# EAGLE board mainboard (EAGLE 6.5.0)
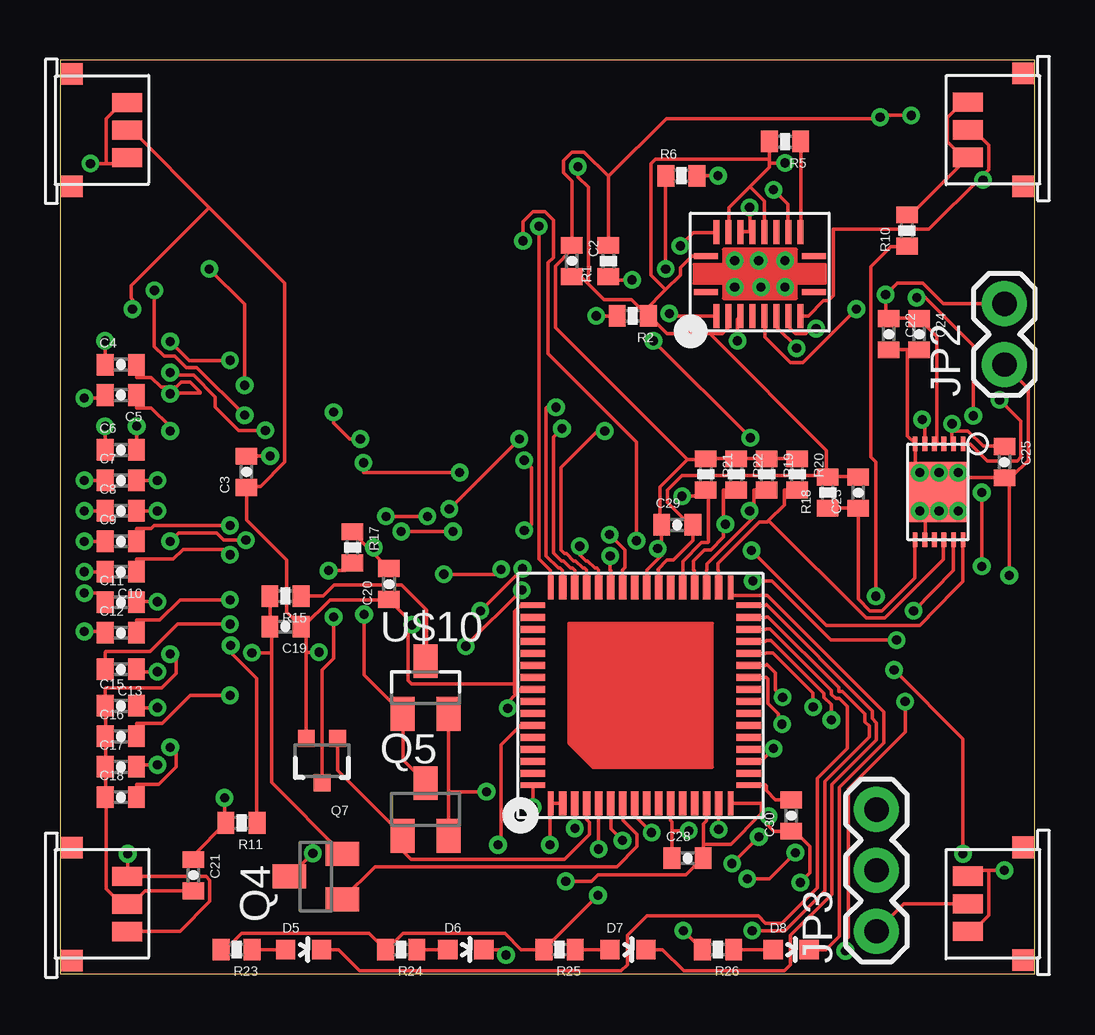
[diagram p0: board, top side]
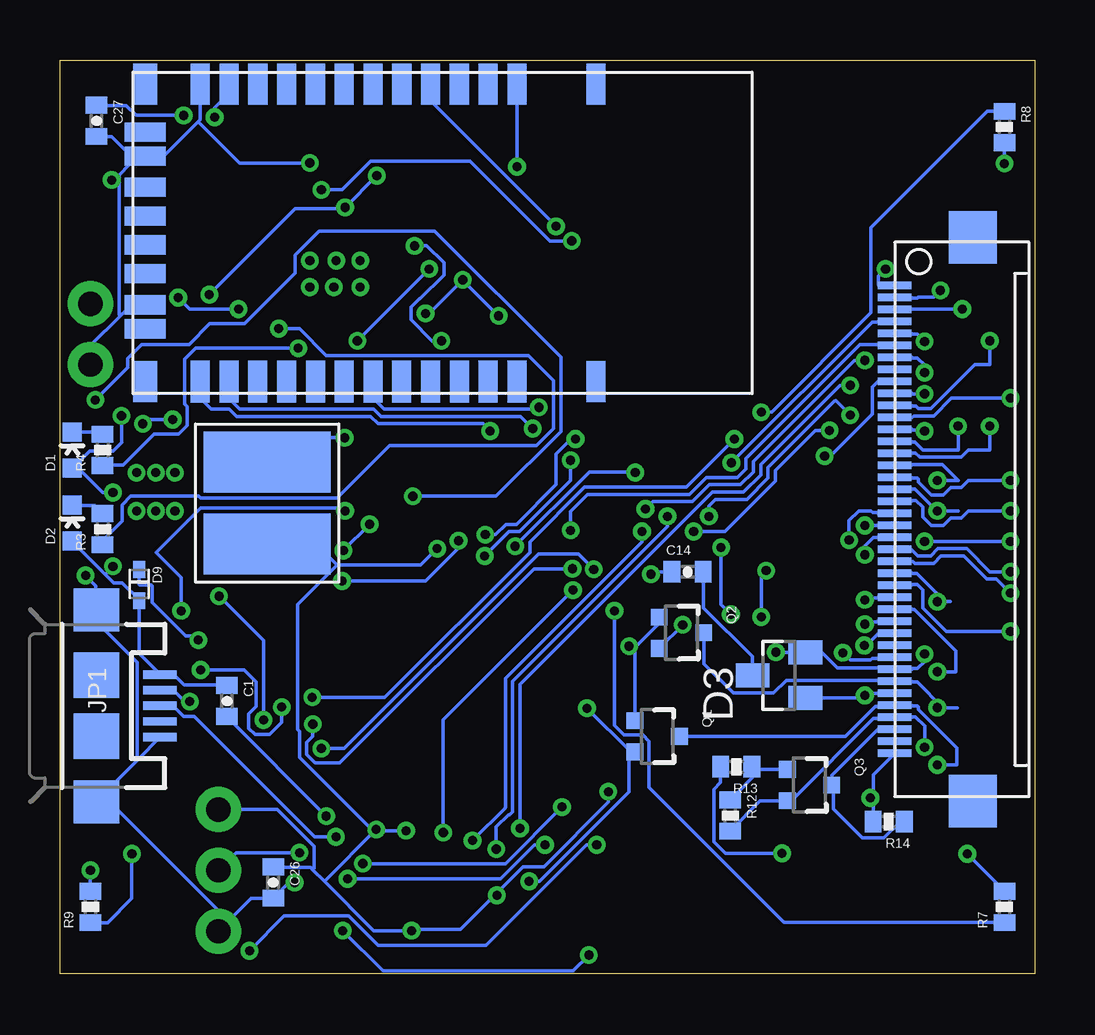
[diagram p1: board, bottom side, seen from below]

Size 40.64 x 38.1 mm. Coordinates in mm from the lower left corner, seen from the top.
Outline: 0,0 40.64,0 40.64,38.1 0,38.1 0,0
Copper layers (1*16): Top 0.035mm / dielectric 1.5mm / Bottom 0.035mm
Design rules "default *": minimum track width 6mil, minimum drill 15mil, track to track 6mil, track to pad 6mil, pad to pad 6mil, via to via 6mil, smd to smd 6mil, copper to edge 2mil, drill to drill 8mil, minimum pad ring 7mil, minimum via ring 7mil, stop-mask expansion 4mil, vias tented up to drill 0mil, thermal gap 10mil

## Footprints (pad centres in the part's own frame; a part is rotated, then mirrored left to right if it is on the bottom)
0402-CAP = smd 0.7 x 0.9: 1 -0.65,0; 2 0.65,0
LED-0603 = smd 0.8 x 0.8: A 0,-0.75; C 0,0.75
SOT23 = smd 1 x 1.4: 1 -0.95,-1.1; 2 0.95,-1.1; 3 0,1.1
SOD523 = smd 0.7 x 0.5: A 0.7,0; C -0.6,0
USB-MICROB = smd 0.35 x 1.4: D+ 0,2.65; D- -0.65,2.65; GND 1.3,2.65; ID 0.65,2.65; VBUS -1.3,2.65 | smd 1.8 x 1.9: MT1 -4,0; MT2 4,0 | smd 1.9 x 1.9: P$1 -1.27,0; P$2 1.27,0
1X02 = drill 1.016 pad 1.88: 1 0,0; 2 2.54,0
1X03 = drill 1.016 pad 1.88: 1 0,0; 2 2.54,0; 3 5.08,0
ASPI_0428S-100M-T = smd 5.309 x 2.54: 1 0,0; 2 0,3.404
SOT323 = smd 0.7 x 0.7: 1 -0.65,-0.925; 2 0.65,-0.925; 3 0,0.925
0402-RES = smd 0.7 x 0.9: 1 -0.65,0; 2 0.65,0
VQFN_RGC_64PIN = smd 1.016 x 0.229: 1 0,8.25; 16 0,0.75; 33 9,0.75; 48 9,8.25 | smd 1.016 x 0.305: 2 0,7.75; 3 0,7.25; 4 0,6.75; 5 0,6.25; 6 0,5.75; 7 0,5.25; 8 0,4.75; 9 0,4.25; 10 0,3.75; 11 0,3.25; 12 0,2.75; 13 0,2.25; 14 0,1.75; 15 0,1.25; 34 9,1.25; 35 9,1.75; 36 9,2.25; 37 9,2.75; 38 9,3.25; 39 9,3.75; 40 9,4.25; 41 9,4.75; 42 9,5.25; 43 9,5.75; 44 9,6.25; 45 9,6.75; 46 9,7.25; 47 9,7.75 | smd 0.229 x 1.016: 17 0.75,0; 32 8.25,0; 49 8.25,9; 64 0.75,9 | smd 0.305 x 1.016: 18 1.25,0; 19 1.75,0; 20 2.25,0; 21 2.75,0; 22 3.25,0; 23 3.75,0; 24 4.25,0; 25 4.75,0; 26 5.25,0; 27 5.75,0; 28 6.25,0; 29 6.75,0; 30 7.25,0; 31 7.75,0; 50 7.75,9; 51 7.25,9; 52 6.75,9; 53 6.25,9; 54 5.75,9; 55 5.25,9; 56 4.75,9; 57 4.25,9; 58 3.75,9; 59 3.25,9; 60 2.75,9; 61 2.25,9; 62 1.75,9; 63 1.25,9
RN-42 = smd 1.7 x 0.8: 1 0.5,16; 2 0.5,14.8; 3 0.5,13.6; 4 0.5,12.4; 5 0.5,11.2; 6 0.5,10; 7 0.5,8.8; 8 0.5,7.6; 9 0.5,6.4; 10 0.5,5.2; 11 0.5,4; 12 0.5,2.8; 13 12.9,2.8; 14 12.9,4; 15 12.9,5.2; 16 12.9,6.4; 17 12.9,7.6; 18 12.9,8.8; 19 12.9,10; 20 12.9,11.2; 21 12.9,12.4; 22 12.9,13.6; 23 12.9,14.8; 24 12.9,16; P$35 0.5,19.3; P$36 12.9,19.3 | smd 0.8 x 1.7: 28 9.7,0.5; 29 3.5,0.5; 30 10.7,0.5; 31 8.4,0.5; 32 7.2,0.5; 33 6,0.5; 34 4.8,0.5; 35 2.5,0.5 | smd 1.7 x 1: P$33 0.5,0.5; P$34 12.9,0.5
VQFN_RHL_20PIN = smd 1 x 0.25: 1 0,1; 10 4.5,1; 11 4.5,2.5; 20 0,2.5 | smd 0.25 x 1: 2 0.45,0; 3 0.95,0; 4 1.45,0; 5 1.95,0; 6 2.45,0; 7 2.95,0; 8 3.45,0; 9 3.95,0; 12 3.95,3.5; 13 3.45,3.5; 14 2.95,3.5; 15 2.45,3.5; 16 1.95,3.5; 17 1.45,3.5; 18 0.95,3.5; 19 0.45,3.5 | drill 0.381: P$21 1.2,2.3; P$22 1.2,1.2; P$23 2.3,1.2; P$24 2.2,2.3; P$25 3.3,2.3; P$26 3.3,1.2
EVP-AEDB2A = smd 0.8 x 1.25: 1 0,0; 1' 2.3,0; 2 1.15,0 | smd 0.9 x 0.9: P$4 -1.2,-2.3; P$5 3.5,-2.3
FH12-40S-0.5SH = smd 0.31 x 1.4: 1 0,0; 2 0.5,0; 3 1,0; 4 1.5,0; 5 2,0; 6 2.5,0; 7 3,0; 8 3.5,0; 9 4,0; 10 4.5,0; 11 5,0; 12 5.5,0; 13 6,0; 14 6.5,0; 15 7,0; 16 7.5,0; 17 8,0; 18 8.5,0; 19 9,0; 20 9.5,0; 21 10,0; 22 10.5,0; 23 11,0; 24 11.5,0; 25 12,0; 26 12.5,0; 27 13,0; 28 13.5,0; 29 14,0; 30 14.5,0; 31 15,0; 32 15.5,0; 33 16,0; 34 16.5,0; 35 17,0; 36 17.5,0; 37 18,0; 38 18.5,0; 39 19,0; 40 19.5,0 | smd 2.2 x 2: G@0 -2,3.25; G@1 21.5,3.25
SON_DRZ_12PIN = smd 0.2 x 0.6: 1 0.2,0; 2 0.6,0; 3 1,0; 4 1.4,0; 5 1.8,0; 6 2.2,0; 7 2.2,4; 8 1.8,4; 9 1.4,4; 10 1,4; 11 0.6,4; 12 0.2,4 | smd 2.5 x 2.5: 13 1.25,2 | drill 0.381: P$15 0.4,2.8; P$16 1.2,2.8; P$17 2,2.8; P$18 2,1.2; P$19 1.2,1.2; P$20 0.4,1.2

## Placement (x,y rotation side)
C1  0.1uF  [0402-CAP]  33.68,11.38 270 bottom
C2  10uF  [0402-CAP]  21.34,29.72 270 top
C3  [0402-CAP]  7.77,20.93 90 top
C4  [0402-CAP]  2.54,25.4 0 top
C5  [0402-CAP]  2.54,24.13 180 top
C6  [0402-CAP]  2.54,21.84 0 top
C7  [0402-CAP]  2.54,20.57 0 top
C8  [0402-CAP]  2.54,19.3 0 top
C9  [0402-CAP]  2.54,18.03 0 top
C10  [0402-CAP]  2.54,16.76 180 top
C11  [0402-CAP]  2.54,15.49 0 top
C12  [0402-CAP]  2.54,14.22 0 top
C13  [0402-CAP]  2.54,12.7 180 top
C14  [0402-CAP]  14.48,16.76 0 bottom
C15  [0402-CAP]  2.54,11.18 0 top
C16  [0402-CAP]  2.54,9.91 0 top
C17  [0402-CAP]  2.54,8.64 0 top
C18  [0402-CAP]  2.54,7.37 0 top
C19  [0402-CAP]  9.4,14.48 180 top
C20  [0402-CAP]  13.72,16.26 90 top
C21  [0402-CAP]  5.56,4.11 270 top
C22  0.1uF  [0402-CAP]  34.54,26.67 270 top
C23  0.1uF  [0402-CAP]  33.27,20.07 90 top
C24  0.1uF  [0402-CAP]  35.81,26.67 270 top
C25  0.47uF  [0402-CAP]  39.37,21.34 270 top
C26  [0402-CAP]  31.75,3.81 270 bottom
C27  0.1uF  [0402-CAP]  39.12,35.56 270 bottom
C28  0.1uF  [0402-CAP]  26.16,4.83 0 top
C29  0.1uF  [0402-CAP]  25.73,18.72 0 top
C30  0.47uF  [0402-CAP]  30.48,6.6 90 top
D1  BLUE  [LED-0603]  40.13,21.84 0 bottom
D2  BLUE  [LED-0603]  40.13,18.8 0 bottom
D3  BAT54S  [SOT23]  10.67,12.45 90 bottom
D5  BLUE  [LED-0603]  10.16,1.02 270 top
D6  BLUE  [LED-0603]  16.92,1.02 270 top
D7  BLUE  [LED-0603]  23.67,1.02 270 top
D8  BLUE  [LED-0603]  30.48,1.02 270 top
D9  [SOD523]  37.34,16.26 270 bottom
JP1  USB-MICROB  [USB-MICROB]  39.12,11.18 270 bottom
JP2  M02PTH  [1X02]  39.37,25.4 90 top
JP3  [1X03]  34.04,1.78 90 top
L1  10uH  [ASPI_0428S-100M-T]  32,21.34 180 bottom
Q1  MOSFET-NCHANNEL2N7002PW  [SOT323]  15.75,9.91 270 bottom
Q2  MOSFET-NCHANNEL2N7002PW  [SOT323]  14.73,14.22 270 bottom
Q3  MOSFET-NCHANNEL2N7002PW  [SOT323]  9.4,7.87 270 bottom
Q4  BSS84  [SOT23]  10.67,4.06 90 top
Q5  BSS84  [SOT23]  15.24,6.86 0 top
Q7  MOSFET-NCHANNEL2N7002PW  [SOT323]  10.92,8.89 180 top
R1  56K  [0402-RES]  22.86,29.72 90 top
R2  10K  [0402-RES]  23.88,27.43 180 top
R3  1.5K  [0402-RES]  38.86,18.54 90 bottom
R4  1.5K  [0402-RES]  38.86,21.84 90 bottom
R5  1.6K  [0402-RES]  30.23,34.7 180 top
R6  10K  [0402-RES]  25.91,33.27 0 top
R7  [0402-RES]  1.27,2.79 90 bottom
R8  [0402-RES]  1.27,35.31 270 bottom
R9  [0402-RES]  39.37,2.79 90 bottom
R10  [0402-RES]  35.31,30.99 90 top
R11  [0402-RES]  7.57,6.3 180 top
R12  [0402-RES]  12.7,6.6 270 bottom
R13  [0402-RES]  12.45,8.64 180 bottom
R14  [0402-RES]  6.1,6.35 180 bottom
R15  [0402-RES]  9.4,15.75 180 top
R17  [0402-RES]  12.19,17.78 270 top
R18  0.01  [0402-RES]  32,20.07 90 top
R19  10K  [0402-RES]  29.46,20.83 270 top
R20  10K  [0402-RES]  30.73,20.83 270 top
R21  1.8M  [0402-RES]  26.92,20.83 270 top
R22  10K  [0402-RES]  28.19,20.83 270 top
R23  [0402-RES]  7.37,1.02 180 top
R24  [0402-RES]  14.22,1.02 180 top
R25  [0402-RES]  20.83,1.02 180 top
R26  [0402-RES]  27.43,1.02 180 top
U$1  MSP430F5528  [VQFN_RGC_64PIN]  28.7,7.11 90 top
U$2  RN-42  [RN-42]  37.59,37.59 270 bottom
U$3  BQ25010  [VQFN_RHL_20PIN]  26.92,27.43 0 top
U$4  EVP-AEDB2A  [EVP-AEDB2A]  2.79,4.06 270 top
U$5  EVP-AEDB2A  [EVP-AEDB2A]  2.79,36.32 270 top
U$6  EVP-AEDB2A  [EVP-AEDB2A]  37.85,1.78 90 top
U$7  EVP-AEDB2A  [EVP-AEDB2A]  37.85,34.04 90 top
U$8  FH12-40S-0.5SH  [FH12-40S-0.5SH]  5.84,28.7 270 bottom
U$9  BQ27410  [SON_DRZ_12PIN]  37.85,22.1 180 top
U$10  DMG2305UX  [SOT23]  15.24,11.94 0 top

## Library data of the parts
C1-C30 = SparkFun-Capacitors
D1 D2 D5-D8 = SparkFun-LED; PROD_ID: DIO-08575
D3 = diode
D9 = SparkFun-DiscreteSemi
JP1 = SparkFun-Connectors; PROD_ID: CONN-09505
JP2 JP3 = SparkFun-Connectors
L1 U$1-U$10 = TuansLib
Q1-Q3 Q7 = SparkFun-DiscreteSemi; PROD_ID: TRANS-11151
Q4 Q5 = transistor-small-signal
R1-R15 R17-R26 = SparkFun-Passives

## Nets
BATT_PWR: C22.1 C24.1 JP2.2 R6.2 U$3.16 U$3.17 U$9.3 U$9.4
BORDER: Q3.3 R14.1 U$8.38
BT_BAUD: U$1.48 U$2.4
BT_CONN: U$1.47 U$2.19
BTN_0: R7.1 U$1.26
BTN_1: R8.1 U$1.27
BTN_2: R9.1 U$1.28
BTN_3: R10.1 U$1.29
EPD_BORDER: Q4.1 U$1.7
EPD_BUSY: U$1.5 U$8.2
EPD_CS: U$1.3 U$8.1
EPD_DISCHARGE: Q1.1 Q2.1 U$1.8
EPD_PANEL: Q5.1 Q7.1 U$1.4
EPD_PWM: C14.1 U$1.19
EPD_RST: U$1.6 U$8.7
GND: C1.2 C2.2 C3.1 C15.1 C16.1 C17.1 C18.1 C19.1 C20.1 C21.2 C22.2 C23.2 C24.2 C25.2 C26.2 C27.2 C28.2 C29.2 C30.1 D3.2 JP1.GND JP1.MT1 JP1.MT2 JP2.1 JP3.1 Q1.2 Q2.2 Q7.2 R2.1 R5.2 R18.2 U$1.14 U$1.16 U$1.39 U$1.49 U$1.56 U$2.1 U$2.12 U$2.28 U$2.29 U$3.3 U$3.9 U$3.15 U$3.18 U$3.20 U$4.2 U$5.2 U$6.2 U$7.2 U$8.3 U$8.33 U$9.6 U$9.8 U$9.9 U$9.13 U$9.P$15 U$9.P$16 U$9.P$17 U$9.P$18 U$9.P$19 U$9.P$20
LED_0: D5.C U$1.30
LED_1: D6.C U$1.31
LED_2: D7.C U$1.32
LED_3: D8.C U$1.33
N$1: R5.1 U$3.12
N$2: D1.C R4.2
N$3: D9.C U$3.13
N$4: D2.C R3.2
N$5: R1.1 R2.2 U$3.2
N$6: L1.1 U$3.19
N$7: C30.2 U$1.17
N$8: Q4.3 R13.2
N$9: C14.2 D3.3
N$10: R4.1 U$3.7
N$11: R3.1 U$3.8
N$12: R6.1 U$3.4
N$13: R7.2 U$4.1 U$4.1'
N$14: R8.2 U$5.1 U$5.1'
N$15: R9.2 U$6.1 U$6.1'
N$16: R10.2 U$7.1 U$7.1'
N$26: C4.2 U$8.10
N$27: C4.1 U$8.11
N$28: C5.2 U$8.12
N$29: C5.1 U$8.13
N$30: C6.2 U$8.14
N$31: C6.1 U$8.15
N$32: C7.2 U$8.16
N$33: C7.1 U$8.17
N$34: C8.2 U$8.18
N$35: C8.1 U$8.19
N$36: C9.1 U$8.20
N$37: C9.2 U$8.21
N$38: C10.1 U$8.22
N$39: C10.2 U$8.23
N$40: C11.1 U$8.24
N$41: C11.2 U$8.25
N$42: C12.1 U$8.26
N$43: C12.2 U$8.27
N$44: C13.1 U$8.28
N$45: C13.2 U$8.29
N$46: C3.2 U$8.9
N$47: R15.1 U$10.3
N$48: D5.A R23.1
N$49: Q3.1 R12.1 R13.1
N$50: C20.2 Q5.3 R17.1 U$10.1
N$51: D6.A R24.1
N$52: Q7.3 R17.2
N$54: C23.1 R18.1 U$9.7
N$55: D7.A R25.1
N$56: D8.A R26.1
PM_BIN: R21.2 U$1.37 U$9.1
PM_GPOUT: R22.2 U$1.36 U$9.12
PM_SCL: R19.2 U$1.35 U$9.11
PM_SDA: R20.2 U$1.34 U$9.10
SENSOR_DATA: JP3.2 U$1.1 U$1.2
SPI_CLK: U$1.44 U$8.4
SPI_MISO: U$1.43 U$8.6
SPI_MOSI: U$1.42 U$8.5
SPYBY_RST: JP1.D+ U$1.64
SPYBY_TEST: JP1.D- U$1.59
UART_RX: U$1.46 U$2.14
UART_TX: U$1.45 U$2.13
VCC: C2.1 C26.1 C27.1 C28.1 C29.1 JP3.3 L1.2 Q5.2 R1.2 R19.1 R20.1 R21.1 R22.1 R23.2 R24.2 R25.2 R26.2 U$1.11 U$1.15 U$1.40 U$2.11 U$10.2
VCC_R: C25.1 U$9.2 U$9.5
VCC_T: C19.2 Q4.2 R15.2 U$8.31 U$8.32
VCOM: C21.1 R11.2 R14.2 U$8.39 U$8.40
VCOM_DRIVER: R11.1 U$8.30
VDH: C17.2 Q1.3 U$8.36
VDL: C18.2 Q3.2 R12.2 U$8.37
VGH: C15.2 Q2.3 U$8.34
VGL: C16.2 D3.1 U$8.35
VUSB: C1.1 D1.A D2.A D9.A JP1.VBUS U$3.6

## Tracks (layer width: path | path; a pad name or v marks a point on that pad's centre or on a via)
BATT_PWR  (via drill 0.38)
  Top 0.152: v27.43,33.27 R6.2 | v28.75,31.95 28.75,31.04 28.85,30.94 U$3.16 28.75,30.94 28.4,30.94 U$3.17 | U$9.3 36.55,22.1 | 36.55,22.1 U$9.4 | 36.55,22.1 36.55,26.57 35.81,27.3 C24.1 35.76,27.33 C22.1 34.49,27.38 34.42,27.46 v34.42,28.32 34.9,28.8 35.97,28.8 36.83,27.94 JP2.2
  Bottom 0.152: v27.43,33.27 v28.75,31.95 28.8,31.9 30.84,31.9 v34.42,28.32
BORDER
  Bottom 0.152: U$8.38 5.84,10.19 6.55,10.19 8.46,8.28 8.46,7.87 Q3.3 8.41,7.82 8.41,6.88 7.19,5.66 6.3,5.66 5.61,6.35 R14.1
BT_BAUD  (via drill 0.38)
  Top 0.152: v19.96,31.17 19.96,17.3 20.45,16.82 20.45,16.13 U$1.48
  Bottom 0.152: v19.96,31.17 25.2,36.4 U$2.4
BT_CONN  (via drill 0.38)
  Top 0.152: U$1.47 20.95,16.13 20.95,16.82 20.85,16.92 20.78,16.92 20.27,17.42 20.27,23.6 20.3,23.62 v20.68,23.62
  Bottom 0.152: v20.68,23.62 20.85,23.62 20.93,23.55 27.13,23.55 27.58,24 U$2.19
BTN_0  (via drill 0.38)
  Top 0.152: v19.28,16.89 v17.53,15.14 | U$1.26 28.7,12.34 29.21,12.34 29.26,12.37 29.44,12.37 29.52,12.29 29.52,11.28 29.95,10.85 29.95,10.57 v30.1,10.41
  Bottom 0.152: v17.53,15.14 17.53,10.36 17.12,9.96 16.33,9.96 16.08,9.7 16.08,7.77 10.46,2.16 1.27,2.16 R7.1 | v19.28,16.89 20.88,16.89 28.98,8.79 30,8.79 30.35,9.14 30.35,9.65 30.1,9.91 v30.1,10.41
BTN_1  (via drill 0.38)
  Top 0.152: v12.52,22.3 12.06,22.3 11.4,22.96 v11.4,23.42 | U$1.27 29.41,12.85 29.46,12.9 29.82,12.55 29.82,11.84 v30.12,11.53
  Bottom 0.152: v12.52,22.3 14.53,20.3 18.77,20.3 21.06,18.01 21.06,17.58 27.1,11.53 v30.12,11.53 | v11.4,23.42 10.97,23.42 6.83,27.56 6.83,31.11 1.98,35.97 R8.1
BTN_2  (via drill 0.38)
  Top 0.152: v37.64,5 37.64,9.8 v34.77,12.68 | v31.39,11.12 31.39,11.71 29.72,13.39 29.44,13.39 29.41,13.36 U$1.28
  Bottom 0.152: v34.77,12.68 32.97,12.68 32.46,12.17 32.46,11.15 32.77,10.85 32.77,10.24 32.51,9.98 31.9,9.98 31.39,10.49 v31.39,11.12 | v37.64,5 37.64,3.15 38.66,2.13 R9.1
BTN_3  (via drill 0.38)
  Top 0.152: v34.01,15.75 34.01,21.34 33.81,21.54 33.81,29.49 34.65,30.33 35.31,30.33 R10.1 | U$1.29 29.41,13.87 29.44,13.89 29.64,13.89 31.85,11.68 31.85,11.53 32.16,11.23 v32.16,10.59
  Bottom 0.152: v32.16,10.59 32.16,13.89 v34.01,15.75
EPD_BORDER
  Top 0.152: U$1.7 23.47,7.11 23.47,6.4 24.05,5.82 24.05,5.31 23.22,4.47 13.13,4.47 11.79,3.12 Q4.1
EPD_BUSY  (via drill 0.38)
  Top 0.152: v13.59,19.07 v15.32,19.07 | v7.7,23.29 5.69,25.27 5.26,25.27 4.78,25.76 4.34,25.76 3.94,26.16 v3.94,28.5 | v22.45,5.21 U$1.5
  Bottom 0.152: v15.32,19.07 15.32,18.64 21.77,12.19 21.77,6.76 21.89,6.63 21.95,6.63 22.45,6.12 v22.45,5.21 22.43,5.16 | v13.59,19.07 13.59,19.51 13.31,19.79 12.01,19.79 11.12,20.68 11.12,21.11 8.36,23.88 8.31,23.9 v7.7,23.29 | U$8.2 5.13,28.19 5.11,28.17 4.9,28.17 4.85,28.22 4.22,28.22 v3.94,28.5
EPD_CS  (via drill 0.38)
  Top 0.152: v7.7,24.54 7.7,27.91 v6.22,29.39 | v21.46,6.07 21.46,7.11 U$1.3
  Bottom 0.152: v21.46,6.07 21.46,12.06 13.44,20.09 12.14,20.09 11.43,20.8 11.43,21.23 8.13,24.54 v7.7,24.54 | v6.22,29.39 6.53,29.08 6.53,28.73 6.5,28.7 U$8.1
EPD_DISCHARGE  (via drill 0.38)
  Top 0.152: U$1.8 23.95,6.6 v24.66,5.89 | v16.92,13.66 v19.25,16 | U$1.8
  Bottom 0.152: 16.66,13.61 15.67,14.61 15.67,14.86 Q2.1 | 16.66,13.61 Q1.1 | v24.66,5.89 24.66,10.59 v19.25,16 | v16.92,13.66 16.71,13.66 16.66,13.61
EPD_PANEL
  Top 0.152: U$1.4 21.95,6.45 22.07,6.33 22.07,5.82 21.03,4.78 14.63,4.78 14.3,5.11 14.3,5.74 Q5.1 14.25,5.82 11.58,8.48 11.58,9.8 Q7.1
EPD_PWM  (via drill 0.38)
  Top 0.152: v16,16.66 18.19,16.66 v18.39,16.87 | v29.74,9.4 29.21,8.87 U$1.19
  Bottom 0.152: C14.1 15.9,16.76 v16,16.66 | v18.39,16.87 19.02,17.5 20.7,17.5 28.8,9.4 v29.74,9.4
EPD_RST  (via drill 0.38)
  Top 0.152: v14.22,18.44 v16.38,18.44 | v4.6,25.07 4.7,24.97 5.56,24.97 6.48,24.05 6.48,23.62 7.44,22.66 v8.56,22.66 | v23.44,5.56 22.96,6.04 22.96,7.11 U$1.6
  Bottom 0.152: v16.38,18.44 16.38,18.01 22.07,12.32 22.07,6.96 22.1,6.91 v23.44,5.56 | v14.22,18.44 12.93,18.44 10.82,20.55 10.82,20.98 9.14,22.66 v8.56,22.66 | v4.6,25.07 4.6,25.38 4.9,25.68 5.11,25.68 5.13,25.7 U$8.7
GND  (via drill 0.38)
  Top 0.152: 26.82,5.41 26.82,6.25 26.95,6.38 U$1.14 | 26.82,5.41 26.82,4.83 C28.2 26.75,4.8 26.09,4.14 22.43,4.14 22.15,3.86 v21.08,3.86 | U$1.16 29.23,7.11 29.23,6.48 29.34,6.38 | 29.34,6.38 29.77,5.94 C30.1 30.53,5.89 30.68,5.89 31.27,5.31 31.27,4.22 v30.86,3.81 | U$1.39 24.94,16.13 24.94,16.82 24.92,16.84 24.92,16.87 25.3,17.25 25.58,17.25 26.39,18.06 C29.2 26.31,18.75 26.24,18.75 25.32,19.66 25.32,20.17 25.93,20.78 31.88,20.78 R18.2 | v4.6,13.34 4.85,13.08 4.85,12.52 4.24,11.91 1.91,11.91 1.88,11.89 C15.1 1.91,11.12 1.91,9.91 C16.1 1.91,9.86 1.91,8.69 C17.1 1.91,8.64 1.91,7.37 C18.1 1.93,7.32 1.93,3.56 2.52,2.97 2.74,2.97 U$4.2 2.79,2.92 3.02,2.92 3.56,3.45 C21.2 | v18.67,11.07 18.67,11.33 19,11.66 | 19,11.66 19.2,11.86 19.68,11.86 U$1.56 | 18.95,12.09 18.95,11.71 19,11.66 | 18.95,12.09 18.95,15.11 19.18,15.34 19.68,15.34 U$1.49 | 10.26,13.41 10.26,14.28 C19.1 | 10.26,13.41 Q7.2 | C19.1 10.01,14.53 9.45,15.09 9.45,17.25 7.77,18.92 C3.1 7.82,20.32 8.36,20.32 9.37,21.34 9.37,28.8 6.22,31.95 | 6.22,31.95 3.02,35.15 2.79,35.15 U$5.2 | C19.1 10.13,14.48 11.25,15.6 13.66,15.6 C20.1 13.72,15.6 14.68,14.63 v14.68,14.55 14.5,14.71 14.5,12.24 14.66,12.09 18.95,12.09 | 10.26,13.41 v10.79,13.41 | R18.2 C23.2 | 21.97,28.83 22.68,28.12 23.82,28.12 24.51,27.43 R2.1 | 21.97,28.83 21.74,29.06 21.34,29.06 C2.2 | 27.13,26.7 25.3,26.7 24.59,27.41 R2.1 | 27.13,26.7 27.61,26.7 27.86,26.95 U$3.3 | R18.2 31.95,20.78 31.95,21.82 27.13,26.64 27.13,26.7 | v21.59,33.66 21.59,33.22 22.02,32.79 22.02,28.88 21.97,28.83 | 29.34,6.38 v29.54,6.58 29.18,6.63 27.96,5.41 26.82,5.41 | JP3.1 35.18,2.92 U$6.2
  Top 0.152: U$3.9 31.19,27.43 31.83,28.07 32.03,28.07 32.23,28.27 32.23,31.04 36.22,31.04 38.38,33.2 | 38.38,33.2 38.71,33.53 38.71,34.54 38.08,35.18 U$7.2 | 35.33,26.04 35.81,26.04 C24.2 | 35.33,26.04 34.54,26.04 C22.2 | U$9.9 36.42,18.11 36.07,18.11 U$9.8 36.07,18.19 36.07,19.07 35.87,19.28 U$9.13 | 35.84,20.9 35.66,21.08 35.66,22.1 U$9.6 35.61,22.15 35.33,22.43 35.33,26.04 | C25.2 39.37,20.7 37.64,20.7 37.47,20.88 U$9.13 | U$9.P$17 35.84,19.3 U$9.13 | U$9.13 36.27,19.66 36.63,19.3 U$9.P$16 36.7,19.3 U$9.P$15 | 35.84,20.9 U$9.P$18 | 35.84,20.9 U$9.13 | U$9.P$19 36.65,20.88 37.01,20.52 U$9.13 | U$9.P$20 U$9.13 | JP2.1 40.36,24.41 40.36,21.41 39.7,20.75 39.42,20.75 C25.2 | v38.48,33.1 38.38,33.2 | v39.57,16.61 39.57,20.7 C25.2 | 25.25,28.52 24.38,27.66 R2.1 | 25.25,28.52 25.86,29.13 25.86,29.44 26.34,29.92 U$3.20 | 29.57,33.81 29.57,33.63 28.75,32.82 | 29.57,33.81 29.57,33.96 | 29.57,33.96 29.57,34.7 R5.2 | 28.75,32.82 27.89,31.95 27.89,30.94 U$3.18 | 28.75,32.82 29.36,32.21 U$3.15 | 25.25,28.52 24.64,29.13 24.64,33.78 24.82,33.96 29.57,33.96 | v30.23,33.81 29.57,33.81 | v3.02,27.71 3.02,28.12 2.97,28.17 2.97,28.7 6.22,31.95
  Bottom 0.152: v4.6,13.34 4.6,13.03 4.9,12.72 5.11,12.72 5.13,12.7 U$8.33 5.89,12.75 8.23,12.75 8.87,13.39 9.55,13.39 D3.2 9.63,13.41 v10.79,13.41 | v18.67,11.07 16.87,9.27 16.69,9.27 Q1.2 16.92,9.22 16.92,7.59 20.65,3.86 v21.08,3.86 | v14.68,14.55 15.65,13.59 Q2.2 | v21.59,33.66 U$2.1 | v29.54,6.58 33.68,10.72 C1.2 | 37.36,8.97 39.12,7.21 JP1.MT2 38.81,7.42 33.66,2.26 JP3.1 32.66,3.15 C26.2 31.7,3.2 31.09,3.81 v30.86,3.81 | 37.36,8.97 36.47,9.86 JP1.GND | 37.36,8.97 37.41,9.02 37.41,12.98 39.12,14.68 JP1.MT1 39.14,15.24 39.14,16.18 v39.57,16.61 | C27.2 38.48,34.9 37.69,34.11 37.11,34.11 U$2.29 | 34.87,35.53 36.27,34.14 37.03,34.14 U$2.29 | 34.87,35.53 34.8,35.61 U$2.12 | 38.12,27.43 39.37,26.19 JP2.1 | 38.12,27.43 37.67,27.89 37.11,27.89 U$2.28 | 38.18,33.1 38.18,27.48 38.12,27.43 | 38.18,33.1 38.18,33.3 37.74,33.73 37.74,34.06 U$2.29 | 38.18,33.1 v38.48,33.1 | v30.23,33.81 33.15,33.81 34.87,35.53 | v3.02,27.71 U$8.3
LED_0
  Top 0.152: U$1.30 29.41,14.35 29.44,14.38 29.59,14.38 32.16,11.81 32.16,11.66 32.33,11.48 32.49,11.48 32.82,11.15 32.82,9.4 31.57,8.15 31.57,3.58 30.1,2.11 29.41,2.11 29.11,2.41 24.46,2.41 23.65,1.6 23.65,0.38 23.39,0.13 12.5,0.13 11.61,1.02 D5.C
LED_1  (via drill 0.38)
  Top 0.152: U$1.31 29.41,14.86 29.44,14.88 29.52,14.88 32.46,11.94 32.46,11.79 32.61,11.79 33.55,10.85 33.55,10.52 33.73,10.34 33.73,9.88 31.88,8.03 31.88,3.45 30.23,1.8 v28.85,1.8 | v18.59,0.79 18.36,1.02 D6.C
  Bottom 0.152: v28.85,1.8 27.18,0.13 19.25,0.13 v18.59,0.79
LED_2
  Top 0.152: U$1.32 29.41,15.37 29.44,15.39 33.86,10.97 33.86,10.64 34.04,10.46 34.04,9.75 32.18,7.9 32.18,3.33 30.45,1.6 30.45,0.38 30.2,0.13 26.01,0.13 25.12,1.02 D7.C
LED_3
  Top 0.152: U$1.33 27.94,15.77 29.49,15.77 34.34,10.92 34.34,9.63 32.49,7.77 32.49,1.57 31.93,1.02 D8.C
N$1
  Top 0.152: R5.1 30.89,30.94 U$3.12
N$2
  Bottom 0.152: D1.C 38.94,22.58 38.86,22.5 R4.2
N$3  (via drill 0.38)
  Top 0.152: v29.74,32.69 30.35,32.08 30.35,30.94 U$3.13 | v19.3,30.56 19.3,31.37 19.71,31.77 20.22,31.77 20.57,31.42 20.57,29.87 20.34,29.64 20.34,25.86 24.03,22.17 v24.03,18.06 | v28.88,16.38 29.67,16.38 32.13,13.92 v34.87,13.92
  Bottom 0.152: D9.C 37.34,16.23 37.31,16.2 36.83,16.2 36.8,16.18 36.8,15.49 35.41,14.1 35.05,14.1 v34.87,13.92 | v29.74,32.69 28.88,32.69 27.69,33.88 23.55,33.88 20.22,30.56 v19.3,30.56 | v24.03,18.06 24.03,17.75 25.4,16.38 v28.88,16.38
N$4
  Bottom 0.152: D2.C 40.13,19.53 39.19,19.53 38.86,19.2 R3.2
N$5  (via drill 0.38)
  Top 0.152: v22.35,27.43 R2.2 | v23.85,28.93 22.99,28.93 22.86,29.06 R1.1 | U$3.2 25.5,27.43 v25.4,27.53
  Bottom 0.152: v22.35,27.43 v23.85,28.93 25.25,27.53 v25.4,27.53
N$6  (via drill 0.38)
  Top 0.152: v25.86,30.35 26.42,30.91 27.36,30.91 U$3.19 | v28.78,22.35 v24.74,26.39
  Bottom 0.152: v25.86,30.35 25.35,30.35 24.64,29.64 24.64,29.13 25.63,28.14 25.65,28.14 26.01,27.79 26.01,27.28 25.12,26.39 v24.74,26.39 | v28.78,22.35 30.99,22.35 L1.1
N$7
  Top 0.152: C30.2 30.48,7.26 29.82,7.26 29.44,7.64 29.44,7.85 29.41,7.87 28.7,7.87 U$1.17
N$8  (via drill 0.38)
  Top 0.152: v10.54,5.03 Q4.3
  Bottom 0.152: v10.54,5.03 12.9,5.03 13.39,5.51 13.39,7.7 13.11,7.98 R13.2
N$9
  Bottom 0.152: C14.2 13.82,16.76 13.82,15.27 11.79,13.23 11.79,12.45 D3.3
N$10  (via drill 0.38)
  Top 0.152: v30.71,26.09 30.71,26.14 29.9,26.95 29.9,27.43 U$3.7
  Bottom 0.152: v30.71,26.09 34.98,26.09 35.43,25.63 35.43,23.75 35.33,23.65 35.33,22.86 35.69,22.5 36.7,22.5 38,21.21 38.86,21.21 R4.1
N$11  (via drill 0.38)
  Top 0.152: v31.52,26.9 31.29,26.9 31.09,26.7 30.66,26.7 30.38,26.98 U$3.8
  Bottom 0.152: R3.1 38.86,18.06 38.05,18.87 38.05,19.56 37.69,19.91 34.85,19.91 34.77,19.84 29.08,19.84 26.9,22.02 20.78,22.02 20.07,22.73 20.07,24.74 21.11,25.78 29.54,25.78 30.66,26.9 v31.52,26.9
N$12  (via drill 0.38)
  Top 0.152: v25.25,29.39 25.25,33.27 R6.1 | v28.25,26.39 28.25,27.3 U$3.4
  Bottom 0.152: v28.25,26.39 v25.25,29.39
N$13  (via drill 0.38)
  Top 0.152: v2.82,5 2.82,4.09 U$4.1 6.1,4.06 6.25,3.91 6.25,3.02 5,1.78 2.79,1.78 U$4.1'
  Bottom 0.152: v2.82,5 1.27,3.45 R7.2
N$14  (via drill 0.38)
  Top 0.152: 1.93,33.78 2.56,33.78 U$5.1' | 1.93,33.78 v1.27,33.78 | U$5.1 2.59,36.32 1.93,35.66 1.93,33.78
  Bottom 0.152: v1.27,33.78 R8.2
N$15  (via drill 0.38)
  Top 0.152: 38.71,4.32 38.08,4.32 U$6.1' | 38.71,4.32 v39.37,4.32 | U$6.1 38.05,1.78 38.71,2.44 38.71,4.32
  Bottom 0.152: v39.37,4.32 R9.2
N$16
  Top 0.152: R10.2 35.46,31.65 U$7.1 37.69,33.98 36.98,34.7 36.98,35.69 37.62,36.32 37.85,36.32 U$7.1'
N$26  (via drill 0.38)
  Top 0.152: C4.2 3.2,24.87 3.81,24.87 4.22,24.46 4.85,24.46 5.05,24.66 5.44,24.66 5.84,24.26 U$8.10 4.62,24.21 v4.6,24.18
  Bottom 0.152: v4.6,24.18 5.11,24.18 5.13,24.21 U$8.10
N$27  (via drill 0.38)
  Top 0.152: v1.88,26.39 C4.1
  Bottom 0.152: U$8.11 5.13,23.7 5.11,23.67 4.95,23.67 4.85,23.57 4.34,23.57 2.52,25.4 C4.1 v1.88,26.39
N$28  (via drill 0.38)
  Top 0.152: v1.02,24 1.88,24 C5.2
  Bottom 0.152: U$8.12 5.13,23.19 5.05,23.27 4.22,23.27 3.48,24 v1.02,24
N$29  (via drill 0.38)
  Top 0.152: C5.1 3.2,23.6 3.81,23.6 4.57,22.84 4.57,22.63 v4.6,22.63
  Bottom 0.152: v4.6,22.63 4.85,22.63 4.9,22.68 5.11,22.68 5.13,22.71 U$8.13
N$30  (via drill 0.38)
  Top 0.152: v3.2,22.84 C6.2
  Bottom 0.152: U$8.14 5.13,22.2 5.11,22.17 5,22.17 4.67,21.84 C6.2 v3.2,22.84
N$31  (via drill 0.38)
  Top 0.152: v1.88,22.84 C6.1
  Bottom 0.152: U$8.15 5.13,21.69 5.11,21.72 4.98,21.72 4.8,21.54 3.07,21.54 2.77,21.84 C6.1 v1.88,22.84
N$32  (via drill 0.38)
  Top 0.152: v4.06,20.57 3.23,20.57 3.2,20.6 3.17,20.57 C7.2
  Bottom 0.152: U$8.16 5.13,21.21 5.11,21.23 3.86,21.23 C7.2 v4.06,20.57
N$33  (via drill 0.38)
  Top 0.152: v1.02,20.57 1.85,20.57 1.88,20.6 1.91,20.57 C7.1
  Bottom 0.152: v1.02,20.57 2.77,20.57 3.07,20.27 3.5,20.27 3.81,19.96 4.32,19.96 4.85,20.5 4.85,20.62 4.9,20.68 5.11,20.68 5.13,20.7 U$8.17
N$34  (via drill 0.38)
  Top 0.152: v4.06,19.3 3.23,19.3 3.2,19.33 3.17,19.3 C8.2
  Bottom 0.152: U$8.18 5.13,20.19 5.11,20.22 5,20.22 4.09,19.3 v4.06,19.3 C8.2
N$35  (via drill 0.38)
  Top 0.152: v1.02,19.3 1.85,19.3 1.88,19.33 1.91,19.3 C8.1
  Bottom 0.152: v1.02,19.3 2.77,19.3 3.07,19 3.5,19 3.81,18.69 4.32,18.69 4.67,19.05 4.67,19.46 4.95,19.74 5.11,19.74 5.13,19.71 U$8.19
N$36  (via drill 0.38)
  Top 0.152: v4.6,18.03 4.95,18.39 6.53,18.39 6.83,18.09 v7.75,18.09 | v1.02,18.03 1.85,18.03 1.88,18.06 1.91,18.03 C9.1
  Bottom 0.152: v4.6,18.03 v1.02,18.03 | v7.75,18.09 7.75,18.9 7.34,19.3 6.83,19.3 6.76,19.23 6.58,19.23 6.55,19.2 U$8.20 | U$8.20
N$37  (via drill 0.38)
  Top 0.152: v7.09,18.69 3.94,18.69 3.81,18.57 3.2,18.57 C9.2
  Bottom 0.152: v7.09,18.69 U$8.21
N$38  (via drill 0.38)
  Top 0.152: C10.1 3.2,17.3 4.72,17.3 5.13,17.7 6.86,17.7 v7.09,17.48
  Bottom 0.152: v7.09,17.48 7.09,17.83 6.73,18.19 6.58,18.19 6.55,18.21 5.84,18.21 U$8.22
N$39  (via drill 0.38)
  Top 0.152: v1.02,16.76 1.85,16.76 1.88,16.79 1.91,16.76 C10.2
  Bottom 0.152: U$8.23 5.16,17.7 4.88,17.42 4.34,17.42 4.04,17.73 2.85,17.73 C10.2 v1.02,16.76
N$40  (via drill 0.38)
  Top 0.152: v1.02,15.88 1.88,15.88 C11.1
  Bottom 0.152: v1.02,15.88 1.6,16.46 2.01,16.46 2.97,17.42 3.91,17.42 4.22,17.12 5,17.12 5.08,17.2 U$8.24
N$41  (via drill 0.38)
  Top 0.152: v4.06,15.52 3.2,15.52 3.17,15.49 C11.2
  Bottom 0.152: 3.76,15.52 3.53,15.52 | 3.76,15.52 4.93,16.69 5.11,16.69 5.13,16.71 5.84,16.71 U$8.25 | v4.06,15.52 3.76,15.52
N$42  (via drill 0.38)
  Top 0.152: v1.02,14.28 1.88,14.28 C12.1
  Bottom 0.152: v1.02,14.28 3.68,14.28 4.67,15.27 4.67,16 4.9,16.23 5.11,16.23 5.13,16.2 U$8.26
N$43  (via drill 0.38)
  Top 0.152: C12.2 3.2,14.76 4.17,14.76 5,15.6 v7.09,15.6
  Bottom 0.152: v7.09,15.6 6.86,15.6 6.78,15.67 6.58,15.67 6.55,15.7 U$8.27
N$44  (via drill 0.38)
  Top 0.152: v4.06,12.6 3.2,12.6 C13.1
  Bottom 0.152: U$8.28 5.84,15.21 5.13,15.21 5.11,15.19 5.03,15.19 3.3,13.46 3.3,12.6 v4.06,12.6
N$45  (via drill 0.38)
  Top 0.152: C13.2 1.88,13.41 1.91,13.44 3.76,13.44 4.9,14.58 v7.09,14.58
  Bottom 0.152: v7.09,14.58 6.88,14.58 6.78,14.68 6.58,14.68 6.55,14.71 U$8.29
N$46  (via drill 0.38)
  Top 0.152: v8.76,21.59 C3.2
  Bottom 0.152: v8.76,21.59 8.53,21.59 6.78,23.34 6.78,24.46 6.55,24.69 U$8.9
N$47
  Top 0.152: R15.1 10.97,15.75 11.43,16.2 14.25,16.2 15.29,15.16 15.29,13.11 15.24,13.06 U$10.3
N$48
  Top 0.152: R23.1 D5.A
N$49
  Bottom 0.152: Q3.1 10.34,8.53 11.68,8.53 11.79,8.64 R13.1 11.48,8.48 12.7,7.26 R12.1
N$50  (via drill 0.38)
  Top 0.152: 12.95,17.65 13.72,16.89 C20.2 | 12.95,17.65 12.19,18.41 R17.1 | Q5.3 15.24,7.98 14.3,8.91 14.3,10.82 U$10.1 14.25,10.9 12.68,12.47 v12.68,14.99 | v13.08,17.78 12.95,17.65
  Bottom 0.152: v13.08,17.78 13.08,15.39 v12.68,14.99
N$51
  Top 0.152: R24.1 D6.A
N$52  (via drill 0.38)
  Top 0.152: Q7.3 10.92,12.68 11.4,13.16 v11.4,14.88 | v11.2,16.82 11.89,16.82 R17.2
  Bottom 0.152: v11.4,14.88 11.4,16.61 v11.2,16.82
N$54
  Top 0.152: U$9.7 35.64,18.09 35.64,16.51 34.27,15.14 33.76,15.14 33.27,15.62 C23.1 33.22,19.43 32,19.43 R18.1
N$55
  Top 0.152: R25.1 D7.A
N$56
  Top 0.152: R26.1 D8.A
PM_BIN  (via drill 0.38)
  Top 0.152: U$1.37 25.96,16.13 25.96,17.2 26.75,17.98 27,17.98 27.03,18.01 27.03,20.17 26.92,20.17 R21.2 26.98,19.91 v25.93,19.91 | U$9.1 37.95,22.1 38.66,21.39 39.9,21.39 40.06,21.54 40.06,23.04 v39.17,23.93
  Bottom 0.152: v39.17,23.93 37.82,25.27 37.82,25.65 37.24,26.24 35.26,26.24 34.39,27.1 32.94,27.1 30.84,29.21 30.84,29.97 29.84,30.96 25.02,30.96 19.76,25.7 19.76,22.61 22.45,19.91 v25.93,19.91
PM_GPOUT  (via drill 0.38)
  Top 0.152: 27.66,18.75 27.66,18.21 27.13,17.68 26.87,17.68 26.42,17.22 26.42,16.84 26.44,16.82 26.44,16.13 U$1.36 | 27.66,18.75 27.66,20.17 28.19,20.17 R22.2 | v28.83,17.65 31.95,14.53 35.84,14.53 36.2,14.88 36.2,14.91 37.64,16.36 37.64,18.09 U$9.12 | v27.74,18.75 27.66,18.75
  Bottom 0.152: v27.74,18.75 v28.83,17.65
PM_SCL  (via drill 0.38)
  Top 0.152: 28.93,19.3 28.93,19.05 26.98,17.09 26.98,16.84 26.95,16.82 26.95,16.13 U$1.35 | 28.93,19.3 28.93,20.17 29.46,20.17 R19.2 | v35.59,15.14 37.24,16.82 37.24,18.09 U$9.11 | 28.93,19.3 v28.75,19.3
  Bottom 0.152: v28.75,19.3 28.88,19.43 34.77,19.43 36.63,17.58 35.59,16.54 v35.59,15.14
PM_SDA
  Top 0.152: 29.54,18.9 29.49,18.85 29.16,18.85 27.43,17.12 27.43,16.84 27.46,16.82 27.46,16.13 U$1.34 | 29.54,18.9 30.2,19.56 30.2,20.17 30.73,20.17 R20.2 | 29.54,18.9 33.6,14.83 34.39,14.83 36.83,17.27 36.83,18.09 U$9.10
SENSOR_DATA  (via drill 0.38)
  Top 0.152: U$1.2 U$1.1 20.42,7.06 v20.42,5.38 | v28.65,3.96 29.57,3.96 v30.66,5.05
  Bottom 0.152: v20.42,5.38 20.85,5.38 22.28,3.96 v28.65,3.96 | v30.66,5.05 33.3,5.05 JP3.2
SPI_CLK  (via drill 0.38)
  Top 0.152: v16.66,20.9 12.65,20.9 v12.65,21.31 | v21.67,17.83 21.67,17.48 21.92,17.22 22,17.22 22.3,16.92 22.38,16.92 22.45,16.84 22.45,16.13 U$1.44
  Bottom 0.152: v12.65,21.31 6.78,27.18 6.58,27.18 6.55,27.2 U$8.4 | v21.67,17.83 18.57,20.93 16.69,20.93 v16.66,20.9
SPI_MISO  (via drill 0.38)
  Top 0.152: v19.36,21.41 19.66,21.11 19.66,18.75 19.38,18.47 v19.36,18.49 | v22.94,17.42 22.94,16.84 22.96,16.82 22.96,16.13 U$1.43
  Bottom 0.152: v19.36,21.41 19.36,20.57 21.49,18.44 21.92,18.44 v22.94,17.42 | v19.36,18.49 19.36,19.28 18.64,19.99 14.4,19.99 13.69,20.7 12.39,20.7 12.04,21.06 12.04,21.49 7.29,26.24 6.58,26.24 6.55,26.21 5.84,26.21 U$8.6
SPI_MOSI  (via drill 0.38)
  Top 0.152: v22.91,18.31 23.55,17.68 23.55,16.94 23.44,16.84 23.44,16.13 U$1.42 | v16.23,19.38 v19.15,22.3 | v7.09,25.58 5.38,25.58 v4.6,26.36
  Bottom 0.152: v19.15,22.3 19.33,22.3 19.96,21.67 19.96,20.4 21.61,18.75 22.05,18.75 22.48,18.31 v22.91,18.31 | v16.23,19.38 15.93,19.68 14.28,19.68 13.56,20.4 12.27,20.4 11.73,20.93 11.73,21.36 7.52,25.58 v7.09,25.58 | v4.6,26.36 4.9,26.67 5.11,26.67 5.13,26.7 U$8.5
SPYBY_RST  (via drill 0.38)
  Top 0.152: v19.71,6.96 U$1.64 | v29.13,5.71 v28.02,4.6
  Bottom 0.152: v19.71,6.96 22.07,4.6 v28.02,4.6 | v29.13,5.71 30.02,5.71 35.05,10.74 35.48,10.74 35.92,11.18 JP1.D+
SPYBY_TEST  (via drill 0.38)
  Top 0.152: v18.26,5.38 18.39,5.51 18.39,9.55 19.18,10.34 19.68,10.34 U$1.59 | v32.74,0.96 32.74,1.4 32.87,1.52 32.87,7.72 35.23,10.08 v35.23,11.35
  Bottom 0.152: v18.26,5.38 18.69,5.38 22.89,1.19 27.38,1.19 28.6,2.41 31.29,2.41 v32.74,0.96 | v35.23,11.35 35.43,11.35 35.89,11.81 36.45,11.81 JP1.D-
UART_RX  (via drill 0.38)
  Top 0.152: U$1.46 21.46,16.13 21.46,16.82 21.36,16.92 21.29,16.92 20.98,17.22 20.9,17.22 20.57,17.55 20.57,22.38 v20.93,22.73
  Bottom 0.152: v20.93,22.73 21.44,23.24 27.25,23.24 27.56,23.55 33.15,23.55 33.6,24 33.6,24.69 U$2.14
UART_TX  (via drill 0.38)
  Top 0.152: U$1.45 21.95,16.13 21.95,16.84 21.87,16.92 21.79,16.92 21.49,17.22 21.41,17.22 21.11,17.53 21.03,17.53 20.88,17.68 20.88,21.11 22.55,22.78 v22.71,22.63
  Bottom 0.152: v22.71,22.63 23.01,22.94 27.38,22.94 27.69,23.24 33.27,23.24 33.58,23.55 34.34,23.55 34.8,24 U$2.13
VCC  (via drill 0.38)
  Top 0.152: 25.5,5.97 25.5,6.35 25.45,6.4 U$1.11 | 25.5,5.97 C28.1 | 25.07,17.73 25.07,17.45 24.46,16.84 24.46,16.13 U$1.40 | 25.07,17.73 C29.1 25.02,18.77 25.02,20.3 26.16,21.44 | R23.2 6.88,1.02 7.57,1.7 12.88,1.7 R24.2 13.64,1.04 14.3,1.7 18.54,1.7 19.23,1.02 R25.2 20.22,1.07 v22.43,3.28 | 16.2,7.59 16.2,10.82 U$10.2 | 16.2,7.59 16.2,5.77 Q5.2 | v25.98,1.8 R26.2 | v27.46,6.02 U$1.15 | v26.21,5.97 25.5,5.97 | v17.78,7.59 16.2,7.59 | v35.48,35.79 34.27,35.79 v34.19,35.71 34.14,35.66 25.27,35.66 22.86,33.25 | 22.86,33.25 21.84,34.27 21.34,34.27 20.98,33.91 20.98,33.4 21.34,33.05 C2.1 21.31,30.3 21.31,30.18 20.65,29.52 20.65,26.95 26.16,21.44 | R1.2 22.86,33.25 | R20.1 29.52,21.49 R19.1 28.25,21.49 R22.1 R21.1 26.87,21.44 26.16,21.44 | 25.07,17.73 v24.92,17.73
  Bottom 0.152: 30.1,4.34 30.2,4.45 31.75,4.45 C26.1 | 30.1,4.34 29.62,3.86 | 29.62,3.86 27.56,1.8 v25.98,1.8 25.93,1.85 23.95,1.85 22.48,3.33 | 29.62,3.86 v27.46,6.02 | v26.21,5.97 27.41,5.97 v27.46,6.02 | v17.78,7.59 17.78,7.16 20.47,4.47 21.34,4.47 22.48,3.33 | JP3.3 31.6,6.86 30.05,5.31 30.05,4.39 30.1,4.34 | v22.43,3.28 22.48,3.33 | v35.48,35.79 37.47,35.79 37.87,36.2 39.12,36.2 C27.1 | v34.19,35.71 34.19,36.12 33.6,36.7 33.6,37.08 U$2.11 | 29.08,17.04 29.97,17.93 L1.2 32.05,17.88 32.74,17.88 | 29.08,17.04 25.6,17.04 v24.92,17.73 | 27.61,5.97 v27.46,6.02 | 29.08,17.04 30.73,15.39 30.73,10.19 30.66,10.11 30.66,9.02 27.66,6.02 v27.46,6.02
VCC_R  (via drill 0.38)
  Top 0.152: v35.94,23.11 36.04,23.01 U$9.5 | U$9.2 37.24,22.1 37.19,22.15 v37.19,22.94 37.24,22.63 37.85,22.63 38.48,22 C25.1
  Bottom 0.152: v35.94,23.11 37.01,23.11 v37.19,22.94
VCC_T  (via drill 0.38)
  Top 0.152: R15.2 8.76,15.75 8.76,14.48 C19.2 8.81,14.43 8.81,13.39 | 8.81,13.39 8.81,7.98 11.76,5.03 Q4.2 | 8.81,13.39 v8,13.39
  Bottom 0.152: U$8.31 U$8.32 5.89,13.16 6.78,13.16 6.86,13.08 7.7,13.08 v8,13.39
VCOM  (via drill 0.38)
  Top 0.152: C21.1 5.56,4.95 R11.2 6.86,6.35 v6.86,7.34
  Bottom 0.152: 6.73,7.34 6.73,8.31 U$8.40 U$8.39 | 6.73,7.34 6.73,6.35 R14.2 | 6.73,7.34 v6.86,7.34
VCOM_DRIVER  (via drill 0.38)
  Top 0.152: v7.11,13.69 7.11,13.41 8.2,12.32 8.2,6.3 R11.1
  Bottom 0.152: v7.11,13.69 7.04,13.69 6.53,14.2 U$8.30
VDH  (via drill 0.38)
  Top 0.152: v4.06,8.71 3.2,8.71 C17.2
  Bottom 0.152: v4.06,8.71 3.25,8.71 3.25,9.42 4.85,11.02 4.85,11.12 4.9,11.18 5.11,11.18 5.13,11.2 U$8.36 5.89,11.15 6.66,11.15 7.9,9.91 Q1.3
VDL  (via drill 0.38)
  Top 0.152: C18.2 3.2,7.9 4.12,7.9 4.85,8.64 4.85,9.2 v4.6,9.45
  Bottom 0.152: v4.6,9.45 4.6,10.34 4.98,10.72 5.11,10.72 5.13,10.69 U$8.37 5.89,10.64 6.73,10.64 10.11,7.26 10.26,7.26 Q3.2 10.34,7.21 11.46,7.21 12.7,5.97 R12.2
VGH  (via drill 0.38)
  Top 0.152: v4.06,11.1 3.2,11.1 C15.2
  Bottom 0.152: 3.83,11.1 3.23,11.1 | 3.83,11.1 4.9,12.17 5.11,12.17 5.13,12.19 U$8.34 5.89,12.24 10.36,12.24 10.9,11.71 12.57,11.71 13.79,12.93 13.79,14.22 Q2.3 | v4.06,11.1 3.83,11.1
VGL  (via drill 0.38)
  Top 0.152: C16.2 3.2,10.44 4.27,10.44 5.44,11.61 v7.09,11.61
  Bottom 0.152: U$8.35 6.55,11.71 6.58,11.68 6.78,11.68 6.86,11.61 v7.09,11.61 7.19,11.51 9.55,11.51 D3.1
VUSB  (via drill 0.38)
  Top 0.152: v38.43,16.99 v38.43,20.07 | v33.2,27.71 30.96,25.48 30.45,25.48 29.39,26.54 29.39,27.43 U$3.6 | v35.71,28.19 36.07,28.19 38.08,26.19 v38.08,23.27
  Bottom 0.152: 38.76,16.66 38.41,16.31 38.05,16.31 37.36,15.62 D9.A 37.34,13.36 36.47,12.5 JP1.VBUS 36.4,12.45 35.87,12.45 35.46,12.04 C1.1 | 38.76,16.66 40.13,18.03 D2.A | v38.43,20.07 38.86,20.07 39.88,21.08 D1.A 40.06,21.13 39.4,21.79 38.43,21.79 38.08,22.15 v38.08,23.27 | 38.76,16.66 v38.43,16.99 | v33.2,27.71 35.23,27.71 v35.71,28.19